# EAGLE board esp32_samostatny (EAGLE 9.0.1)

Size 100 x 80 mm. Coordinates in mm from the lower left corner, seen from the top.
Outline: 0,0 100,0 100,80 0,80 0,0
Copper layers (1*16): Top 0.035mm / dielectric 1.5mm / Bottom 0.035mm
Design rules "default": minimum track width 6mil, minimum drill 0.35mm, track to track 6mil, track to pad 6mil, pad to pad 6mil, via to via 6mil, smd to smd 6mil, copper to edge 40mil, drill to drill 6mil, minimum pad ring 10mil, minimum via ring 8mil, stop-mask expansion 4mil, vias tented up to drill 0mil, thermal gap 10mil
Net classes: 1 gnd: width 0.635 mm, drill 0.635 mm, clearance 0.254 mm; 2 vcc: width 0.406 mm, drill 0.406 mm, clearance 0.254 mm

## Footprints (pad centres in the part's own frame; a part is rotated, then mirrored left to right if it is on the bottom)
DPACK = smd 1 x 1.6: 1 -2.28,-4.8; 3 2.28,-4.8 | smd 5.4 x 6.2: 2 0,2.5
C0603 = smd 1.1 x 1: 1 -0.85,0; 2 0.85,0
C5B3 = drill 0.813 pad 1.6 octagon: 1 -2.54,0; 2 2.54,0
SOT223 = smd 1.499 x 2.007: 1 -2.261,-3.15; 2 0.025,-3.15; 3 2.311,-3.15 | smd 3.81 x 2.007: 4 0,3.15
1,6/0,8 = drill 0.813 pad 1.6 octagon: 1 0,0
Q62902-B153 = drill 0.813 long: A 1.27,0; K -1.27,0
TL3XYO = drill 1.1 pad 1.422 long: 1 -2.54,0; 2 0,0; 3 2.54,0 | drill 1.1 pad 1.676: M1 -5.08,0; M2 5.08,0
CHIP-LED0603 = smd 0.8 x 0.8: A 0,-0.75; C 0,0.75
S202S02 = drill 1: 1 -7.62,0; 2 -2.54,0; 3 5.08,0; 4 7.62,0
P47F-BOTTOM = smd 2.6 x 2.6: A -2.45,0; C 2.45,0 | hole 2.3: 0,0
TO5 = drill 0.813 octagon: 1 0,-2.54; 2 2.54,0; 3 0,2.54
ESP-WROOM-32 = smd 0.9 x 1.5: 1 7.7,9; 2 6.43,9; 3 5.16,9; 4 3.89,9; 5 2.62,9; 6 1.35,9; 7 0.08,9; 8 -1.19,9; 9 -2.46,9; 10 -3.73,9; 11 -5,9; 12 -6.27,9; 13 -7.54,9; 14 -8.81,9; 25 -8.81,-9; 26 -7.54,-9; 27 -6.27,-9; 28 -5,-9; 29 -3.73,-9; 30 -2.46,-9; 31 -1.19,-9; 32 0.08,-9; 33 1.35,-9; 34 2.62,-9; 35 3.89,-9; 36 5.16,-9; 37 6.43,-9; 38 7.7,-9 | smd 1.5 x 0.9: 15 -10.3,5.715; 16 -10.3,4.445; 17 -10.3,3.175; 18 -10.3,1.905; 19 -10.3,0.635; 20 -10.3,-0.635; 21 -10.3,-1.905; 22 -10.3,-3.175; 23 -10.3,-4.445; 24 -10.3,-5.715 | smd 6 x 6: GND 0,0
DFN6_3X3_SI = smd 0.85 x 0.45: 1 -1.45,1; 2 -1.45,0; 3 -1.45,-1; 4 1.45,-1; 5 1.45,0; 6 1.45,1 | smd 1.6 x 2.5: P$1 0,0
22-23-2031 = drill 1 long: 1 -2.54,0; 2 0,0; 3 2.54,0

## Placement (x,y rotation side)
7805  LP2950  [DPACK]  -76.2,7.62 0 top  (outside the outline)
C3  10uF  [C0603]  -31.75,78.74 0 top  (outside the outline)
C8  100uF  [C5B3]  -71.12,-22.86 0 top  (outside the outline)
C10  10uF  [C5B3]  -71.12,-55.88 0 top  (outside the outline)
C12  100uF  [C5B3]  -71.12,-88.9 0 top  (outside the outline)
C14  10uF  [C5B3]  -71.12,-121.92 0 top  (outside the outline)
IC3  1117-3.3  [SOT223]  -74.93,-7.62 0 top  (outside the outline)
L1  [1,6/0,8]  -44.45,77.47 0 top  (outside the outline)
LED2  [Q62902-B153]  -43.18,59.69 0 top  (outside the outline)
N1  [1,6/0,8]  -40.64,77.47 0 top  (outside the outline)
S2  TL32YO  [TL3XYO]  -29.21,48.26 0 top  (outside the outline)
S3  TL32YO  [TL3XYO]  -41.91,48.26 0 top  (outside the outline)
S4  TL32YO  [TL3XYO]  -54.61,48.26 0 top  (outside the outline)
S5  TL32YO  [TL3XYO]  -19.05,60.96 0 top  (outside the outline)
SIGNALIZACNA-LED-PRE-WIFI1  [CHIP-LED0603]  -13.97,1.27 0 top  (outside the outline)
SSR-RELAY1  S202S02  [S202S02]  -22.86,73.66 0 top  (outside the outline)
SVETLO-LED-230V-AC1  LYP4-BOTTOM  [P47F-BOTTOM]  -49.53,71.12 0 top  (outside the outline)
T2  2N1613  [TO5]  -62.23,33.02 0 top  (outside the outline)
U1  ESP-WROOM-32  [ESP-WROOM-32]  -33.02,10.16 0 top  (outside the outline)
U4  Si7021-A20  [DFN6_3X3_SI]  -25.4,78.74 0 top  (outside the outline)
X1  22-23-2031  [22-23-2031]  -71.12,-138.43 0 top  (outside the outline)
X2  22-23-2031  [22-23-2031]  -71.12,-153.67 0 top  (outside the outline)

## Library data of the parts
7805 = linear
C3 = rcl
C8 C10 C12 C14 = capacitor-wima
IC3 = burr-brown; MPN: REG1117; OC_FARNELL: 1097566; OC_NEWARK: 14P6981
L1 N1 = wirepad
LED2 SIGNALIZACNA-LED-PRE-WIFI1 = adafruit
S2-S5 = switch
SSR-RELAY1 = relay; MPN: S202S02F; OC_FARNELL: 1618475; OC_NEWARK: 14N9588
SVETLO-LED-230V-AC1 = led
T2 = transistor
U1 = esp32
U4 = microbuilder
X1 X2 = con-molex; MF: MOLEX; MPN: 22-23-2031; OC_FARNELL: 1462950; OC_NEWARK: 30C0862

## Nets
DTR: X2.3
EN: S2.2 S3.2 U1.3 X1.1
GND [gnd]: 7805.2 C3.2 C8.2 C10.2 C12.2 C14.2 IC3.1 S2.3 S3.3 T2.1 U1.1 U1.15 U1.24 U1.GND
IO4: U1.26
IO5: U1.29
IO6: U1.20
IO7: U1.21
IO8: U1.22
IO9: U1.17
IO10: U1.18
IO11: U1.19
IO12: U1.14
IO13: U1.16
IO14: U1.13
IO15: U1.23
IO16: U1.27
IO17: U1.28
IO18: U1.30
IO19: U1.31
IO21: U1.33 U4.1
IO22: U1.36 U4.6
IO25: U1.10
IO26: U1.11
IO27: U1.12
IO32: U1.8
IO33: U1.9
IO34: U1.6
IO35: U1.7
IO36: U1.4
IO39: U1.5
N$2: X1.2
N$4: S4.3 S5.3
N$6: S2.1 S3.1
N$7: S4.1 S5.1
N$8 [gnd]: SIGNALIZACNA-LED-PRE-WIFI1.C U1.38 U4.2
N$10: N1.1 SVETLO-LED-230V-AC1.C
N$11: L1.1 SSR-RELAY1.2
N$12: SSR-RELAY1.1 SVETLO-LED-230V-AC1.A
N$13: SIGNALIZACNA-LED-PRE-WIFI1.A
N$14: 7805.3 C10.1 SSR-RELAY1.3
N$15: SSR-RELAY1.4 T2.3
N$16: T2.2
N$17: LED2.K U1.37
RXD0: U1.34
TXD0: U1.35
VCC: 7805.1 C3.1 C8.1 C12.1 C14.1 IC3.2 IC3.3 S4.2 S5.2 U1.2 U1.25 U4.5 X2.1

## Tracks (layer width: path | path; a pad name or v marks a point on that pad's centre or on a via)
EN  (3 unrouted)
GND  (13 unrouted)
IO21  (1 unrouted)
IO22  (1 unrouted)
N$4  (1 unrouted)
N$6  (1 unrouted)
N$7  (1 unrouted)
N$8  (2 unrouted)
N$10  (1 unrouted)
N$11  (1 unrouted)
N$12  (1 unrouted)
N$14  (2 unrouted)
N$15  (1 unrouted)
N$17  (1 unrouted)
VCC  (12 unrouted)